# Altium PCB F800GSDayLight_line10x230.PcbDoc
Units mm, origin at the board's own origin, x right, y up, seen from the top; angles counter-clockwise.
Board outline 230 x 10 mm, 4 copper layers (Top Layer, Internal Plane 1, Internal Plane 2, Bottom Layer), stack 0.462 mm thick; 44 components, 24 nets, 88 pads, 4 vias.
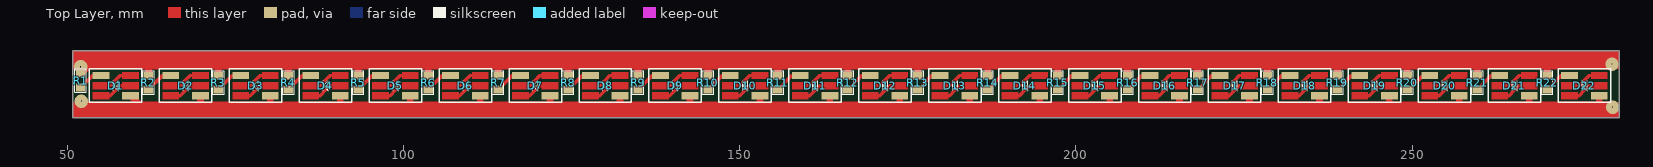
[diagram p0: Top Layer view]
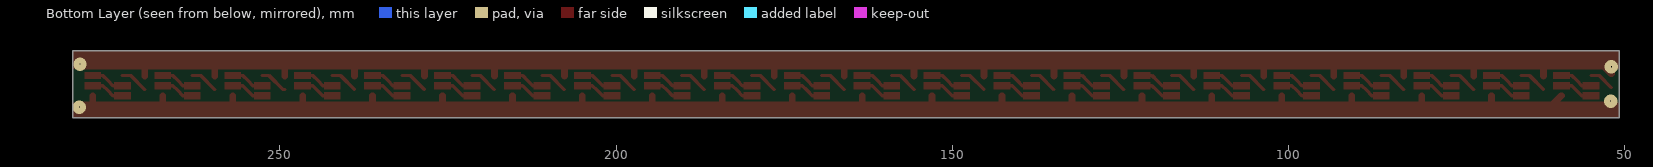
[diagram p1: Bottom Layer view, seen from below]
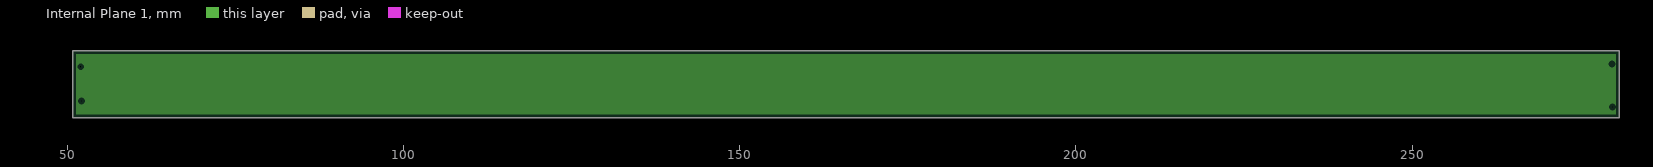
[diagram p2: Internal Plane 1, clearances drawn from the general rule]
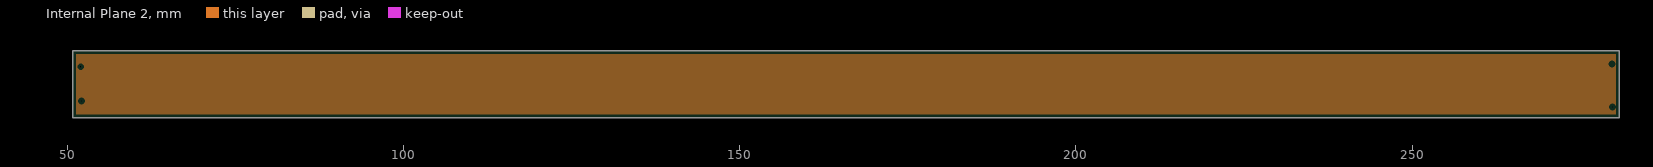
[diagram p3: Internal Plane 2, clearances drawn from the general rule]
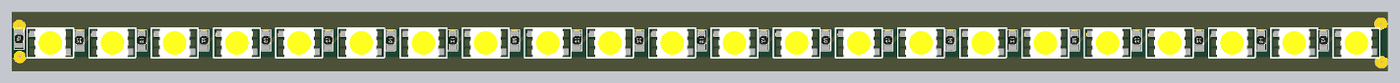
[diagram p4: 3D render of the assembled board from above, using the file's embedded part models]

## Layer stack, top to bottom
Top Solder: solder mask 0.0102, Solder Resist, Dk 3.5
Top Layer: signal copper 0.0356
Internal Plane 1: plane copper 0.0356
Internal Plane 2: plane copper 0.0356
Dielectric 1: dielectric 0.32, FR-4, Dk 4.8
Bottom Layer: signal copper 0.0356
Bottom Solder: solder mask 0.0102, Solder Resist, Dk 3.5

## Board outline
50.8,76.2 280.8,76.2 280.8,86.2 50.8,86.2

## Design rules (kind name [scope] priority, off if disabled: settings)
Clearance [All] p1: gap=0.2
PlaneClearance [All] p1: clearance=0.508
PlaneConnect [All] p1: planeconnectstyle=Relief reliefexpansion=0.508 reliefentries=4 reliefconductorwidth=0.254 reliefairgap=0.254
PolygonConnect [All] p1: connectstyle=Relief reliefconductorwidth=0.254 reliefentries=4 polygonreliefangle="90 Angle" airgapwidth=0.254
RoutingVias [All] p1: holewidth=0.4 width=3 viastyle="Through Hole" minholewidth=0.711 minwidth=1.27 maxholewidth=0.711 maxwidth=1.27
SolderMaskExpansion [All] p1: expansion=0.102
Width [All] p1: maxlimit=2 minlimit=0.2 preferedwidth=1
27 further rules are at their usual default settings.

## Components (designator, comment, footprint, x,y, rotation, side; value= is the part's Value field where it differs from the comment)
D1 "Cold White" "LED SMD 5050 White compact R" 59.4,79.5 r180 top
D2 "Cold White" "LED SMD 5050 White compact R" 69.8,79.5 r180 top
D3 "Cold White" "LED SMD 5050 White compact R" 80.2,79.5 r180 top
D4 "Cold White" "LED SMD 5050 White compact R" 90.6,79.5 r180 top
D5 "Cold White" "LED SMD 5050 White compact R" 101,79.5 r180 top
D6 "Cold White" "LED SMD 5050 White compact R" 111.4,79.5 r180 top
D7 "Cold White" "LED SMD 5050 White compact R" 121.8,79.5 r180 top
D8 "Cold White" "LED SMD 5050 White compact R" 132.2,79.5 r180 top
D9 "Cold White" "LED SMD 5050 White compact R" 142.6,79.5 r180 top
D10 "Cold White" "LED SMD 5050 White compact R" 153,79.5 r180 top
D11 "Cold White" "LED SMD 5050 White compact R" 163.4,79.5 r180 top
D12 "Cold White" "LED SMD 5050 White compact R" 173.8,79.5 r180 top
D13 "Cold White" "LED SMD 5050 White compact R" 184.2,79.5 r180 top
D14 "Cold White" "LED SMD 5050 White compact R" 194.6,79.5 r180 top
D15 "Cold White" "LED SMD 5050 White compact R" 205,79.5 r180 top
D16 "Cold White" "LED SMD 5050 White compact R" 215.4,79.5 r180 top
D17 "Cold White" "LED SMD 5050 White compact R" 225.8,79.5 r180 top
D18 "Cold White" "LED SMD 5050 White compact R" 236.2,79.5 r180 top
D19 "Cold White" "LED SMD 5050 White compact R" 246.6,79.5 r180 top
D20 "Cold White" "LED SMD 5050 White compact R" 257,79.5 r180 top
D21 "Cold White" "LED SMD 5050 White compact R" 267.4,79.5 r180 top
D22 "Cold White" "LED SMD 5050 White compact R" 277.8,79.5 r180 top
R1 "240Om" "SMD 0805 (2012)" 52,80.7 r90 top
R2 "240Om" "SMD 0805 (2012)" 62.1,80.4 r90 top
R3 "240Om" "SMD 0805 (2012)" 72.5,80.4 r90 top
R4 "240Om" "SMD 0805 (2012)" 82.9,80.4 r90 top
R5 "240Om" "SMD 0805 (2012)" 93.3,80.4 r90 top
R6 "240Om" "SMD 0805 (2012)" 103.7,80.4 r90 top
R7 "240Om" "SMD 0805 (2012)" 114.1,80.4 r90 top
R8 "240Om" "SMD 0805 (2012)" 124.5,80.4 r90 top
R9 "240Om" "SMD 0805 (2012)" 134.9,80.4 r90 top
R10 "240Om" "SMD 0805 (2012)" 145.3,80.4 r90 top
R11 "240Om" "SMD 0805 (2012)" 155.7,80.4 r90 top
R12 "240Om" "SMD 0805 (2012)" 166.1,80.4 r90 top
R13 "240Om" "SMD 0805 (2012)" 176.5,80.4 r90 top
R14 "240Om" "SMD 0805 (2012)" 186.9,80.4 r90 top
R15 "240Om" "SMD 0805 (2012)" 197.3,80.4 r90 top
R16 "240Om" "SMD 0805 (2012)" 207.7,80.4 r90 top
R17 "240Om" "SMD 0805 (2012)" 218.1,80.4 r90 top
R18 "240Om" "SMD 0805 (2012)" 228.5,80.4 r90 top
R19 "240Om" "SMD 0805 (2012)" 238.9,80.4 r90 top
R20 "240Om" "SMD 0805 (2012)" 249.3,80.4 r90 top
R21 "240Om" "SMD 0805 (2012)" 259.7,80.4 r90 top
R22 "240Om" "SMD 0805 (2012)" 270.1,80.4 r90 top

## Footprints (in the part's own frame and the unit in brackets; to place one, negate y for a bottom-side part, rotate by r counter-clockwise, add the part's x,y. Pads: shape width x height; smd on the part's side, far side on the other; paste and mask are expansions set on the pad)
"LED SMD 5050 White compact R" [mm]
  rect 2.5x1.1 smd: A(0,0) K(4.4,-3)
  Top Layer region: -1.25,-3.55 1.25,-3.55 1.25,-2.45 -1.25,-2.45
  Top Layer region: -1.25,-2.05 1.25,-2.05 1.25,-0.95 -1.25,-0.95
  Top Layer region: 3.15,-2.05 5.65,-2.05 5.65,-0.95 3.15,-0.95
  Top Layer region: 3.15,-0.55 5.65,-0.55 5.65,0.55 3.15,0.55
  Top Layer lines w0.5: 4.4,0 3,0 2.2,-0.8 1.5,-1.5 0,-1.5 ; 4.4,-1.5 3,-1.5 2.3,-2.2 1.5,-3 0,-3
  silkscreen extent -1.7,-4 6.1,1, body extent -0.45,-4 4.85,1, height 1.6
"SMD 0805 (2012)" [mil]
  rect 45x55 smd: 1(0.35,0.98) 2(80.35,0.98)
  silkscreen extent -29,-32 109,34, body extent 1,-24 80,26, height 18

## Part data
D1 D2 D3 D4 D5 D6 D7 D8 D9 D10 D11 D12 D13 D14 D15 D16 D17 D18 D19 D20 D21 D22: library part "Led SMD White Cold", "?3v ?20mA"
R1 R2 R3 R4 R5 R6 R7 R8 R9 R10 R11 R12 R13 R14 R15 R16 R17 R18 R19 R20 R21 R22: library part "Res All Types"

## Via types
v1: diameter 2, hole 0, Top Layer to Bottom Layer, 4 vias

## Nets (pads, with @x,y where several pads share a name; then routed paths per layer and width w, separated by ;. In a path a pad name is that pad's centre, name@x,y a point inside that pad or via, vN(x,y) a via of type N, cw(c..) or ccw(c..) an arc to the next point about the centre after c; other vN are vias at no path point)
GND: R1.2 R2.2 R3.2 R4.2 R5.2 R6.2 R7.2 R8.2 R9.2 R10.2 R11.2 R12.2 R13.2 R14.2 R15.2 R16.2 R17.2 R18.2 R19.2 R20.2 R21.2 R22.2 | length 258.4
  Top Layer w1: R1.2 53.134,83.9 v1@280,83.9 ; R2.2 62.075,83.875 ; R3.2 72.475,83.825 ; R4.2 82.875,83.875 ; R5.2 93.275,83.825 ; R6.2 103.675,83.875 ; R7.2 114.075,83.875 ; R8.2 124.475,83.875 ; R9.2 134.875,83.875 ; R10.2 145.275,83.875 ; R11.2 155.675,83.875 ; R12.2 166.075,83.875 ; R13.2 176.475,83.875 ; R14.2 186.875,83.875 ; R15.2 197.275,83.875 ; R16.2 207.675,83.875 ; R17.2 218.075,83.875 ; R18.2 228.475,83.875 ; R19.2 238.875,83.875 ; R20.2 249.275,83.825 ; R21.2 259.675,83.875 ; R22.2 270.075,83.825
  other v1: 52,83.8 279.7,84.2
NetD1_K: D1.K R1.1 | length 3.8
  Top Layer w0.5: R1.1 53.766,82.5 D1.K
NetD2_K: D2.K R2.1 | length 4.2
  Top Layer w0.5: R2.1 64.166,82.5 D2.K
NetD3_K: D3.K R3.1 | length 4.2
  Top Layer w0.5: R3.1 74.566,82.5 D3.K
NetD4_K: D4.K R4.1 | length 4.2
  Top Layer w0.5: R4.1 84.966,82.5 D4.K
NetD5_K: D5.K R5.1 | length 4.2
  Top Layer w0.5: R5.1 95.366,82.5 D5.K
NetD6_K: D6.K R6.1 | length 4.2
  Top Layer w0.5: R6.1 105.766,82.5 D6.K
NetD7_K: D7.K R7.1 | length 4.2
  Top Layer w0.5: R7.1 116.166,82.5 D7.K
NetD8_K: D8.K R8.1 | length 4.2
  Top Layer w0.5: R8.1 126.566,82.5 D8.K
NetD9_K: D9.K R9.1 | length 4.2
  Top Layer w0.5: R9.1 136.966,82.5 D9.K
NetD10_K: D10.K R10.1 | length 4.2
  Top Layer w0.5: R10.1 147.366,82.5 D10.K
NetD11_K: D11.K R11.1 | length 4.2
  Top Layer w0.5: R11.1 157.766,82.5 D11.K
NetD12_K: D12.K R12.1 | length 4.2
  Top Layer w0.5: R12.1 168.166,82.5 D12.K
NetD13_K: D13.K R13.1 | length 4.2
  Top Layer w0.5: R13.1 178.566,82.5 D13.K
NetD14_K: D14.K R14.1 | length 4.2
  Top Layer w0.5: R14.1 188.966,82.5 D14.K
NetD15_K: D15.K R15.1 | length 4.2
  Top Layer w0.5: R15.1 199.366,82.5 D15.K
NetD16_K: D16.K R16.1 | length 4.2
  Top Layer w0.5: R16.1 209.766,82.5 D16.K
NetD17_K: D17.K R17.1 | length 4.2
  Top Layer w0.5: R17.1 220.166,82.5 D17.K
NetD18_K: D18.K R18.1 | length 4.2
  Top Layer w0.5: R18.1 230.566,82.5 D18.K
NetD19_K: D19.K R19.1 | length 4.2
  Top Layer w0.5: R19.1 240.966,82.5 D19.K
NetD20_K: D20.K R20.1 | length 4.2
  Top Layer w0.5: R20.1 249.509,80.409 251.6,82.5 D20.K
NetD21_K: D21.K R21.1 | length 4.2
  Top Layer w0.5: R21.1 261.766,82.5 D21.K
NetD22_K: D22.K R22.1 | length 4.2
  Top Layer w0.5: R22.1 272.166,82.5 D22.K
VCC: D1.A D2.A D3.A D4.A D5.A D6.A D7.A D8.A D9.A D10.A D11.A D12.A D13.A D14.A D15.A D16.A D17.A D18.A D19.A D20.A D21.A D22.A | length 259.5
  Top Layer w1: v1(52.1,78.7) 52.1,78.5 52,78.4 52.3,78.1 60.8,78.1 ; D1.A 60.8,78.1 ; D2.A 69.8,78.1 ; D3.A 80.2,78.1 ; D4.A 90.6,78.1 ; D5.A 101,78.1 ; D6.A 111.4,78.1 ; D7.A 121.8,78.1 ; D8.A 132.2,78.1 ; D9.A 142.6,78.1 ; D10.A 153,78.1 ; D11.A 163.4,78.1 ; 173.8,78.2 D12.A ; D13.A 184.2,78.1 ; D14.A 194.6,78.1 ; D15.A 205,78.1 ; 215.4,78.2 D16.A ; D17.A 225.8,78.1 ; D18.A 236.2,78.1 ; D19.A 246.6,78.1 ; D20.A 257,78.1 ; D21.A 267.4,78.1 ; D22.A 277.8,78.1 ; v1@279.9,78.1 277.8,78.1 ; 60.8,78.1 69.8,78.1 ; 69.8,78.1 80.2,78.1 ; 80.2,78.1 90.6,78.1 ; 90.6,78.1 101,78.1 ; 101,78.1 111.4,78.1 ; 111.4,78.1 121.8,78.1 ; 121.8,78.1 132.2,78.1 ; 132.2,78.1 142.6,78.1 ; 142.6,78.1 153,78.1 ; 153,78.1 163.4,78.1 ; 163.4,78.1 184.2,78.1 ; 184.2,78.1 194.6,78.1 ; 194.6,78.1 205,78.1 ; 205,78.1 225.8,78.1 ; 225.8,78.1 236.2,78.1 ; 236.2,78.1 246.6,78.1 ; 246.6,78.1 257,78.1 ; 257,78.1 267.4,78.1 ; 267.4,78.1 277.8,78.1
  other v1: 279.8,77.8

## Other copper
Top Layer:
  rectangle net VCC: 50.8,76.2 280.8,78.5
  rectangle net GND: 50.8,83.5 280.8,86.2